# Altium PCB A6C.PcbDoc
Units mm, origin at the board's own origin, x right, y up, seen from the top; angles counter-clockwise.
Board outline 62.23 x 38.1 mm, 2 copper layers (Top Layer, Bottom Layer); 24 components, 181 nets, 114 pads, 0 vias.
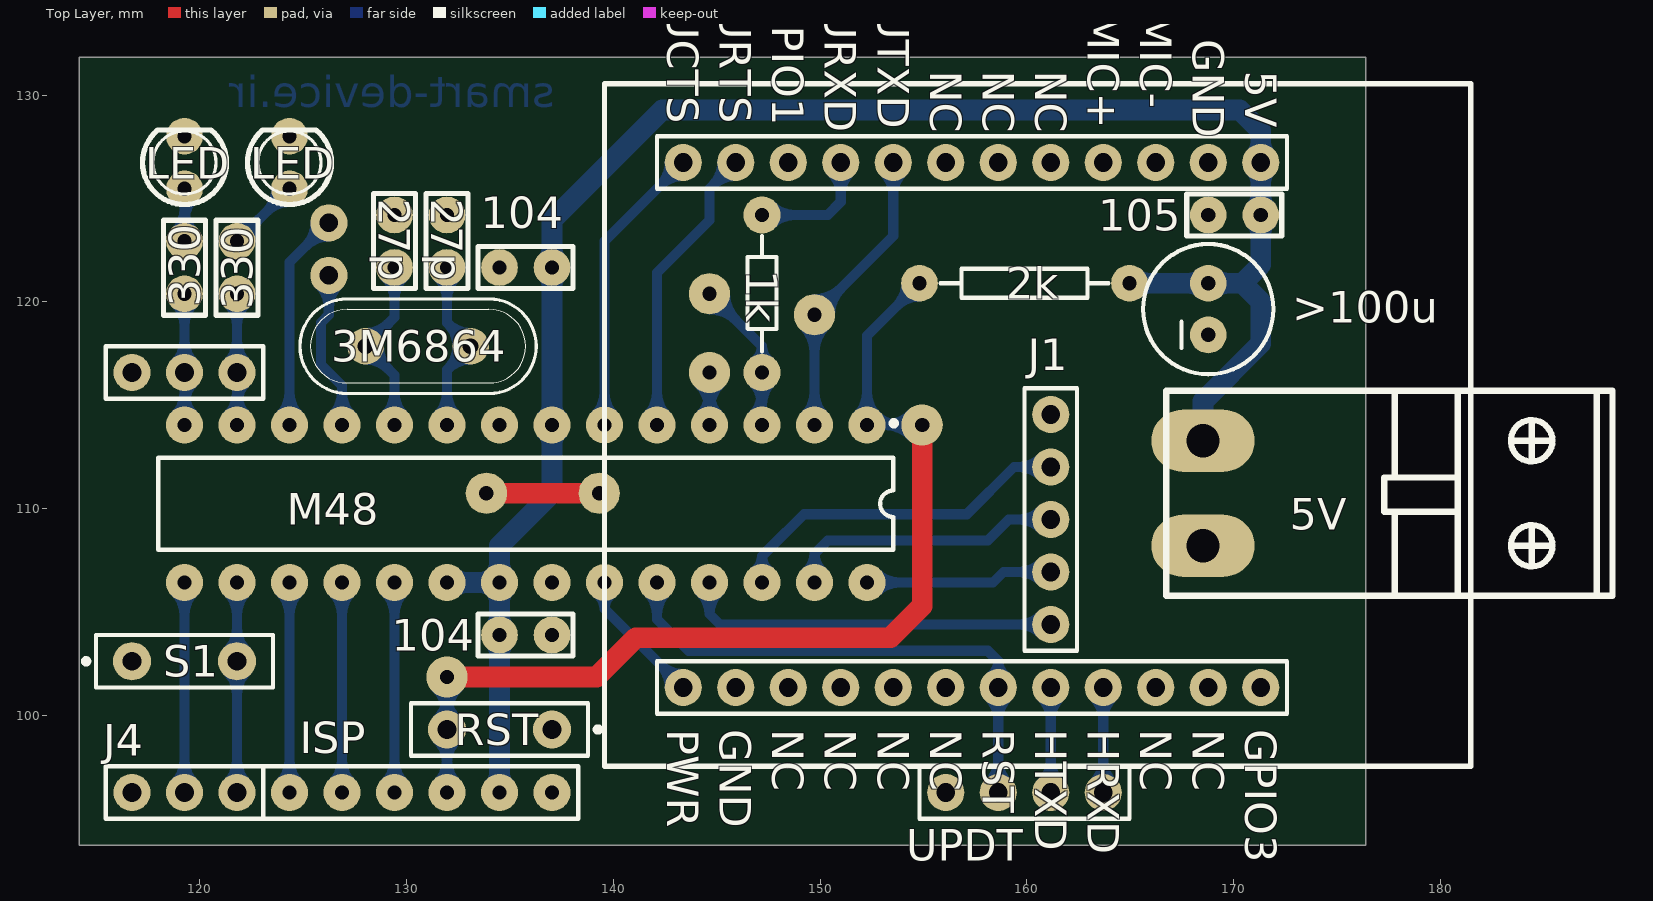
[diagram p0: Top Layer view]
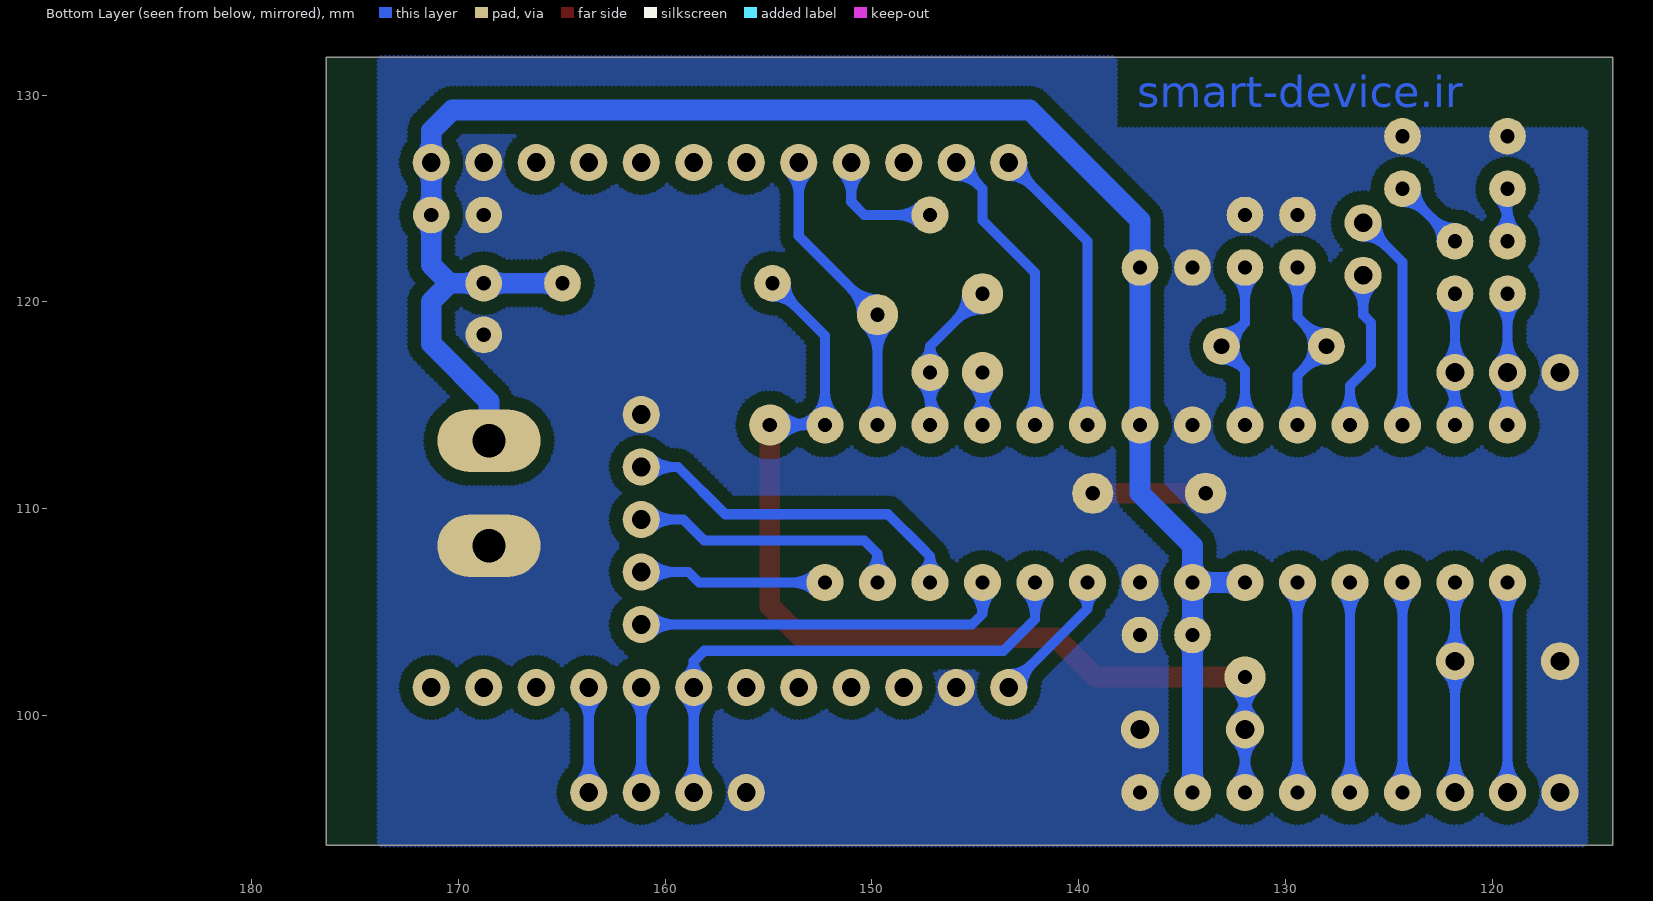
[diagram p1: Bottom Layer view, seen from below]

## Layer stack, top to bottom
Top Solder: solder mask 0.0102, Solder Resist, Dk 3.5
Top Layer: signal copper 0.0356
Dielectric 1: dielectric 0.32, FR-4, Dk 4.8
Bottom Layer: signal copper 0.0356
Bottom Solder: solder mask 0.0102, Solder Resist, Dk 3.5

## Board outline
114.173,93.726 114.173,131.826 176.403,131.826 176.403,93.726

## Design rules (kind name [scope] priority, off if disabled: settings)
Clearance [All] p1: gap=0.635 ignorepadtopadclearanceinfootprint=FALSE
PlaneClearance [All] p1: clearance=0.635
PlaneConnect [All] p1: planeconnectstyle=Direct reliefexpansion=0.508 reliefentries=4 reliefconductorwidth=0.254 reliefairgap=0.254
PolygonConnect [All] p1: connectstyle=Direct reliefconductorwidth=0.254 reliefentries=4 polygonreliefangle="90 Angle" airgapwidth=0.254
RoutingVias [All] p1: holewidth=0.711 width=1.27 viastyle="Through Hole" minholewidth=0.711 minwidth=1.27 maxholewidth=0.711 maxwidth=1.27
SolderMaskExpansion [All] p1: expansion=0.102
Width [All] p1: maxlimit=2.54 minlimit=0.229 preferedwidth=0.254
28 further rules are at their usual default settings.

## Components (designator, comment, footprint, x,y, rotation, side; value= is the part's Value field where it differs from the comment)
1k "" AXIAL-0.3nar 147.193,124.206 r270 top
2k "" axial-0.4nar 164.973,120.904 r180 top
3M6864 "" Crystal 130.683,117.856 r180 top
5V "" phoenix2 168.529,113.284 r270 top (schematic designator J12)
27p "" rad-0.1nar 131.953,121.666 r90 top
27p "" rad-0.1nar 129.413,121.666 r90 top
104 "" rad-0.1nar 137.033,121.666 r180 top
104 "" rad-0.1nar 137.033,103.886 r180 top
105 "" rad-0.1nar 171.323,124.206 r180 top
330 "" rad-0.1nar 119.253,122.936 r270 top
330 "" rad-0.1nar 121.793,122.936 r270 top
>100u "100uF/25V" "RADIAL CAPACITOR - 100uF" 168.783,119.654 r90 top (schematic designator C3)
ISP "" HDR1X6 137.033,96.266 r180 top
J1 "" HDR1X5 161.163,104.394 r90 top
J4 "" HDR1X3 121.793,96.266 r180 top
LED "" LED 119.253,125.476 r180 top
LED "" LED 124.333,125.476 r180 top
M48 "" My_28P3 135.763,110.236 r180 top
RST "" SPST-2 134.493,99.314 r180 top
S1 "" SPST-2 119.253,102.616 r0 top
UPDT "" HDR1X4 163.703,96.266 r180 top
? "" HDR1X12 143.383,101.346 r0 top
? "" HDR1X12 143.383,126.746 r0 top
? "" HDR1X3 121.793,116.586 r180 top

## Footprints (in the part's own frame and the unit in brackets; to place one, negate y for a bottom-side part, rotate by r counter-clockwise, add the part's x,y. Pads: shape width x height; smd on the part's side, far side on the other; paste and mask are expansions set on the pad)
AXIAL-0.3nar [mm] "AXIAL-0.3 Narrow Res"
  round 1.8 hole 0.7: 1(0,0) 2(7.62,0)
  silkscreen extent 1.02,-0.7 6.6,0.7
axial-0.4nar [mil] "AXIAL-0.4 Narrow Res"
  round 70 hole 27.56: 1(0,0) 2(400,0)
  silkscreen extent 40,-28 360,28
Crystal [mil] "Crystal"
  round 70 hole 30: 1(-95,0) 2(105,0)
  silkscreen extent -220,-90 230,90
HDR1X3 [mm] "Connector; Header; 3 Position"
  round 1.8 hole 0.9: 1(0,0) 2(2.54,0) 3(5.08,0)
  silkscreen extent -1.27,-1.27 6.35,1.27
HDR1X4 [mm] "Connector; Header; 4 Position"
  round 1.8 hole 0.9: 1(0,0) 2(2.54,0) 3(5.08,0) 4(7.62,0)
  silkscreen extent -1.27,-1.27 8.89,1.27
HDR1X5 [mm] "Connector; Header; 5 Position"
  round 1.8 hole 0.9: 1(0,0) 2(2.54,0) 3(5.08,0) 4(7.62,0) 5(10.16,0)
  silkscreen extent -1.27,-1.27 11.43,1.27
HDR1X6 [mm] "Connector; Header; 6 Position"
  round 1.8 hole 0.7: 1(0,0) 2(2.54,0) 3(5.08,0) 4(7.62,0) 5(10.16,0) 6(12.7,0)
  silkscreen extent -1.27,-1.27 13.97,1.27
HDR1X12 [mm] "Connector; Header; 12 Position"
  round 1.8 hole 0.9: 1(0,0) 2(2.54,0) 3(5.08,0) 4(7.62,0) 5(10.16,0) 6(12.7,0) 7(15.24,0) 8(17.78,0) 9(20.32,0) 10(22.86,0) 11(25.4,0) 12(27.94,0)
  silkscreen extent -1.27,-1.27 29.21,1.27
LED [mil] "3mm LED"
  round 70 hole 27.56: 1(0,0) 2(0,-100)
  silkscreen extent -80,-112 80,30
My_28P3 [mm]
  round 1.8 hole 0.7: 1(-16.51,-3.81) 2(-13.97,-3.81) 3(-11.43,-3.81) 4(-8.89,-3.81) 5(-6.35,-3.81) 6(-3.81,-3.81) 7(-1.27,-3.81) 8(1.27,-3.81) 9(3.81,-3.81) 10(6.35,-3.81) 11(8.89,-3.81) 12(11.43,-3.81) 13(13.97,-3.81) 14(16.51,-3.81) 15(16.51,3.81) 16(13.97,3.81) 17(11.43,3.81) 18(8.89,3.81) 19(6.35,3.81) 20(3.81,3.81) 21(1.27,3.81) 22(-1.27,3.81) 23(-3.81,3.81) 24(-6.35,3.81) 25(-8.89,3.81) 26(-11.43,3.81) 27(-13.97,3.81) 28(-16.51,3.81)
  silkscreen extent -17.93,-4.02 17.78,2.23
phoenix2 [mm] "Phoenix 2"
  oval 3x5 hole 1.6: 1(5.08,0) 2(0,0)
  silkscreen extent -2.41,-1.78 7.49,19.81
rad-0.1nar [mil] "RAD-0.1 Narrow"
  round 70 hole 27.56: 1(0,0) 2(100,0)
  silkscreen extent -40,-40 141,40
"RADIAL CAPACITOR - 100uF" [mm] "RADIAL CAPACITOR - 100uF"
  round 1.778 hole 0.7: 1(1.25,0)
  round 1.778 hole 0.7 paste+0: 2(-1.25,0)
  silkscreen extent -3.15,-3.15 3.15,3.15
SPST-2 [mm] "Switch; 2 Leads"
  round 1.85 hole 0.9: 1(-2.54,0) 2(2.54,0)
  silkscreen extent -4.89,-1.27 4.28,1.27

## Part data
5V: library part "Header 2", "Header, 2-Pin", LatestRevisionDate=17-Jul-2002, LatestRevisionNote="Re-released for DXP Platform.", Publisher="Altium Limited"
>100u: library part "Cap Pol1", "Polarized Capacitor (Radial)", LatestRevisionDate=17-Jul-2002, LatestRevisionNote="Re-released for DXP Platform.", PackageDescription="Polarized Capacitor (Radial); 2 Leads", PackageReference=RB7.6-15, Published=8-Jun-2000, Publisher="Altium Limited"
? ?: library part "Header 12"

## Free pads (board coordinates)
  round 2 hole 0.7: 2(131.953,101.854) 3(154.94,114.046) 94(133.858,110.744) 95(139.319,110.744) 96(144.653,116.586) 97(144.653,120.396) 98(149.733,119.38)
  round 1.8 hole 0.9: 4(126.238,123.825) 5(126.238,121.285)

## Nets (pads, with @x,y where several pads share a name; then routed paths per layer and width w, separated by ;. In a path a pad name is that pad's centre, name@x,y a point inside that pad or via, vN(x,y) a via of type N, cw(c..) or ccw(c..) an arc to the next point about the centre after c; other vN are vias at no path point)
3V3: 
+5: 5V.2
+12V: 
+24V: 
A: 
Aref: 
AVcc: 
B: 
Ch1: 
Ch2: 
Ch3: 
Ch4: 
Ch5: 
Ch6: 
Ch7: 
Ch8: 
EARTH: 
GND: 5V.1 27p.2 104.1@137.033,103.886 104.2@134.493,121.666 105.2 >100u.2 ?.2@145.923,101.346 ?.3@116.713,116.586 ?.11@168.783,126.746 ISP.1 J1.5 J4.3 LED.2 M48.8 M48.22 pad.94 pad.95 RST.1 S1.1 UPDT.4 | length 5.5
  Top Layer w1: pad.94 pad.95
NetC21_1: 
NetC21_2: 
NetC24_2: 
NetC32_1: 
NetC32_2: 
NetC35_1: 
NetC35_2: 
NetC36_1: 
NetC36_2: 
NetD2_2: 
NetD3_1: 
NetD3_2: 
NetD4_1: 
NetD4_2: 
NetD5_1: 
NetD5_2: 
NetD6_1: 
NetD6_2: 
NetD7_1: 
NetD7_2: 
NetD8_1: 
NetD8_2: 
NetD9_1: 
NetD9_2: 
NetD10_1: 
NetD10_2: 
NetD11_2: 
NetD12_2: 
NetJ5_2: 
NetJ6_2: 
NetJ7_2: 
NetJ8_2: 
NetJ9_2: 
NetJ10_2: 
NetJ11_2: 
NetJ12_2: 
NetJ13_1: 
NetJ13_2: 
NetJ14_3: 
NetJr_2: 
NetJr_3: 
NetJr_4: 
NetJr_5: 
NetJr_6: 
NetJr_7: 
NetJr_8: 
NetJr_9: 
NetQ1_1: 
NetQ1_2: 
NetR1_2: 
NetR2_2: 
NetR3_2: 
NetR4_2: 
NetR5_2: 
NetR6_2: 
NetR7_2: 
NetR8_2: 
NetR9_1: 
NetR10_1: 
NetR11_1: 
NetR12_1: 
NetR13_1: 
NetR14_1: 
NetR15_1: 
NetR16_1: 
NetR18_2: 
NetR19_1: 
NetR20_1: 
NetR21_1: 
NetR22_1: 
NetR23_1: 
NetR24_1: 
NetR25_1: 
NetR28_1: 
NetR29_1: 
NetR30_1: 
NetR31_1: 
NetR33_2: 
NetR34_1: 
NetR36_2: 
NetR37_2: 
NetR39_2: 
NetR40_1: 
NetR42_2: 
NetR43_2: 
NetR46_2: 
NetR47_2: 
NetR48_1: 
NetR49_1: 
NetR51_2: 
NetR52_2: 
NetR54_2: 
NetR55_2: 
NetR56_1: 
NetR57_1: 
NetR58_1: 
NetR59_1: 
NetRa3_2: 
NetRa3_3: 
NetRa3_4: 
NetRa3_5: 
NetRa3_6: 
NetRa3_7: 
NetRa3_8: 
NetRa3_9: 
OC0: 
OC1A: 
OC1B: 
OC3A: 
OC3B: 
OC3C: 
PA0: 
PA1: 
PA2: 
PA3: 
PA4: 
PA5: 
PA6: 
PA7: 
PB0: 
PB1: 
PB2: 
PB3: 
PB7: 
PC0: 
PC1: 
PC2: 
PC3: 
PC4: 
PC5: 
PC6: 
PC7: 
PD0: 
PD1: 
PD4: 
PD5: 
PD6: 
PD7: 
PE2: 
PE6: 
PE7: 
PF0: 
PF1: 
PF2: 
PF3: 
PF4: 
PF5: 
PF6: 
PF7: 
PG0: 
PG1: 
PG2: 
PG3: 
PG4: 
PWM1: 
PWM2: 
PWM3: 
PWM4: 
RX0: 
RX1: 
TX0: 
TX1: 
VCC: 
pads on no net: 1k.1 1k.2 2k.1 2k.2 3M6864.1 3M6864.2 27p.1 104.1@137.033,121.666 104.2@134.493,103.886 105.1 330.1 330.2 >100u.1 ?.1 ?.2@119.253,116.586 ?.2@145.923,126.746 ?.3@148.463,101.346 ?.3@148.463,126.746 ?.4 ?.5 ?.6 ?.7 ?.8 ?.9 ?.10 ?.11@168.783,101.346 ?.12 ISP.2 ISP.3 ISP.4 ISP.5 ISP.6 J1.1 J1.2 J1.3 J1.4 J4.1 J4.2 LED.1 M48.1 M48.2 M48.3 M48.4 M48.5 M48.6 M48.7 M48.9 M48.10 M48.11 M48.12 M48.13 M48.14 M48.15 M48.16 M48.17 M48.18 M48.19 M48.20 M48.21 M48.23 M48.24 M48.25 M48.26 M48.27 M48.28 RST.2 S1.2 UPDT.1 UPDT.2 UPDT.3
copper on no net: | length 621.8
  Top Layer w1: 131.953,101.854 139.192,101.854 141.097,103.759 153.416,103.759 154.94,105.283 154.94,114.046
  Bottom Layer w0.5: 118.793,96.726 ccw(c117.684,97.835) 119.253,97.835 ccw(c120.822,97.835) 119.713,96.726 ; 118.793,105.966 cw(c117.684,104.857) 119.253,104.857 cw(c120.822,104.857) 119.713,105.966 ; 118.793,114.506 ccw(c117.684,115.615) 119.253,115.615 ccw(c120.822,115.615) 119.713,114.506 ; 118.793,117.046 ccw(c117.684,118.155) 119.253,118.155 ccw(c120.822,118.155) 119.713,117.046 ; 118.801,119.944 cw(c117.71,118.853) 119.253,118.853 cw(c120.796,118.853) 119.705,119.944 ; 118.801,123.388 ccw(c117.71,124.479) 119.253,124.479 ccw(c120.796,124.479) 119.705,123.388 ; 119.253,96.266 119.253,106.426 ; 119.253,114.046 119.253,120.396 ; 119.253,115.017 cw(c120.822,115.017) 119.713,116.126 ; 119.253,122.936 119.253,125.476 ; 119.253,123.933 cw(c120.796,123.933) 119.705,125.024 ; 121.316,102.139 cw(c120.163,100.986) 121.793,100.986 cw(c123.423,100.986) 122.27,102.139 ; 121.316,103.093 ccw(c120.163,104.246) 121.793,104.246 ccw(c123.423,104.246) 122.27,103.093 ; 121.333,96.726 ccw(c120.224,97.835) 121.793,97.835 ccw(c123.362,97.835) 122.253,96.726 ; 121.333,105.966 cw(c120.224,104.857) 121.793,104.857 cw(c123.362,104.857) 122.253,105.966 ; 121.333,114.506 ccw(c120.224,115.615) 121.793,115.615 ccw(c123.362,115.615) 122.253,114.506 ; 121.333,117.046 ccw(c120.224,118.155) 121.793,118.155 ccw(c123.362,118.155) 122.253,117.046 ; 121.341,119.944 cw(c120.25,118.853) 121.793,118.853 cw(c123.336,118.853) 122.245,119.944 ; 121.793,96.266 121.793,106.426 ; 121.793,114.046 121.793,120.396 ; 121.793,115.017 cw(c123.362,115.017) 122.253,116.126 ; 121.793,122.936 124.333,125.476 ; 121.793,123.575 ccw(c121.793,125.118) 122.884,124.027 ccw(c123.975,122.936) 122.432,122.936 ; 123.694,125.476 cw(c122.151,125.476) 123.242,124.385 cw(c124.333,123.294) 124.333,124.837 ; 123.873,96.726 ccw(c122.764,97.835) 124.333,97.835 ccw(c125.902,97.835) 124.793,96.726 ; 123.873,105.966 cw(c122.764,104.857) 124.333,104.857 cw(c125.902,104.857) 124.793,105.966 ; 123.873,114.506 ccw(c122.764,115.615) 124.333,115.615 ccw(c125.902,115.615) 124.793,114.506 ; 124.333,96.266 124.333,106.426 ; 124.333,114.046 124.333,121.92 126.238,123.825 ; 125.588,123.825 cw(c124.019,123.825) 125.128,122.715 cw(c126.238,121.606) 126.238,123.175 ; 125.778,120.825 cw(c124.669,119.716) 126.238,119.716 cw(c127.807,119.716) 126.698,120.825 ; 126.238,121.285 126.238,119.38 125.857,118.999 125.857,116.967 126.873,115.951 126.873,114.046 ; 126.413,96.726 ccw(c125.304,97.835) 126.873,97.835 ccw(c128.442,97.835) 127.333,96.726 ; 126.413,105.966 cw(c125.304,104.857) 126.873,104.857 cw(c128.442,104.857) 127.333,105.966 ; 126.413,114.506 ccw(c125.304,115.615) 126.873,115.615 ccw(c128.442,115.615) 127.333,114.506 ; 126.873,96.266 126.873,106.426 ; 128.016,117.217 cw(c128.016,115.674) 129.107,116.765 cw(c130.198,117.856) 128.655,117.856 cw(c130.198,117.856) 129.107,118.947 cw(c128.016,120.038) 128.016,118.495 ; 128.953,96.726 ccw(c127.844,97.835) 129.413,97.835 ccw(c130.982,97.835) 129.873,96.726 ; 128.953,105.966 cw(c127.844,104.857) 129.413,104.857 cw(c130.982,104.857) 129.873,105.966 ; 128.953,114.506 ccw(c127.844,115.615) 129.413,115.615 ccw(c130.982,115.615) 129.873,114.506 ; 128.961,121.214 cw(c127.87,120.123) 129.413,120.123 cw(c130.956,120.123) 129.865,121.214 ; 129.413,96.266 129.413,106.426 ; 129.413,114.046 129.413,116.459 128.016,117.856 129.413,119.253 129.413,121.666 ; 131.423,101.324 cw(c130.142,100.043) 131.953,100.043 cw(c133.764,100.043) 132.483,101.324 ; 131.476,98.837 cw(c130.323,97.684) 131.953,97.684 cw(c133.583,97.684) 132.43,98.837 ; 131.476,99.791 ccw(c130.323,100.944) 131.953,100.944 ccw(c133.583,100.944) 132.43,99.791 ; 131.493,96.726 ccw(c130.384,97.835) 131.953,97.835 ccw(c133.522,97.835) 132.413,96.726 ; 131.493,114.506 ccw(c130.384,115.615) 131.953,115.615 ccw(c133.522,115.615) 132.413,114.506 ; 131.501,121.214 cw(c130.41,120.123) 131.953,120.123 cw(c133.496,120.123) 132.405,121.214 ; 131.953,96.266 131.953,101.854 ; 131.953,114.046 131.953,116.713 133.096,117.856 131.953,118.999 131.953,121.666 ; 133.096,117.217 ccw(c133.096,115.674) 132.005,116.765 ccw(c130.914,117.856) 132.457,117.856 ccw(c130.914,117.856) 132.005,118.947 ccw(c133.096,120.038) 133.096,118.495 ; 139.113,114.506 ccw(c138.004,115.615) 139.573,115.615 ccw(c141.142,115.615) 140.033,114.506 ; 139.193,105.899 cw(c138.657,105.156) 139.573,105.156 ; 139.573,106.426 139.573,105.156 ; 139.573,114.046 139.573,122.936 143.383,126.746 ; 139.953,105.899 ccw(c140.489,105.156) 139.573,105.156 ; 141.653,105.966 cw(c140.544,104.857) 142.113,104.857 cw(c143.682,104.857) 142.573,105.966 ; 141.653,114.506 ccw(c140.544,115.615) 142.113,115.615 ccw(c143.682,115.615) 142.573,114.506 ; 142.113,106.426 142.113,104.648 143.637,103.124 158.115,103.124 158.623,102.616 ; 142.113,114.046 142.113,121.412 144.653,123.952 144.653,125.476 145.923,126.746 ; 142.733,101.346 ccw(c141.164,101.346) 142.273,102.456 ccw(c143.383,103.565) 143.383,101.996 ; 142.733,126.746 cw(c141.164,126.746) 142.273,125.636 cw(c143.383,124.527) 143.383,126.096 ; 143.383,101.346 139.573,105.156 ; 144.123,116.056 cw(c142.842,114.775) 144.653,114.775 cw(c146.464,114.775) 145.183,116.056 ; 144.193,114.506 ccw(c143.084,115.615) 144.653,115.615 ccw(c146.222,115.615) 145.113,114.506 ; 144.203,105.957 cw(c143.192,104.902) 144.653,104.902 ; 144.653,106.426 144.653,104.902 ; 144.653,114.046 144.653,116.586 ; 144.653,119.646 cw(c144.653,117.835) 145.933,119.116 cw(c147.214,120.396) 145.403,120.396 ; 144.653,120.396 147.193,117.856 ; 145.103,105.957 ccw(c146.114,104.902) 144.653,104.902 ; 145.273,126.746 cw(c143.704,126.746) 144.813,125.636 cw(c145.923,124.527) 145.923,126.096 ; 146.733,114.506 ccw(c145.624,115.615) 147.193,115.615 ; 146.813,106.953 ccw(c146.277,107.696) 147.193,107.696 ; 147.193,106.426 147.193,107.696 ; 147.193,114.046 147.193,116.586 147.193,117.856 ; 147.193,124.206 150.368,124.206 151.003,124.841 151.003,126.746 ; 147.573,106.953 cw(c148.109,107.696) 147.193,107.696 ; 149.203,118.85 cw(c147.922,117.569) 149.733,117.569 cw(c151.544,117.569) 150.263,118.85 ; 149.273,114.506 ccw(c148.164,115.615) 149.733,115.615 ccw(c151.302,115.615) 150.193,114.506 ; 149.314,106.923 ccw(c148.557,107.823) 149.733,107.823 ; 149.733,106.426 149.733,107.823 ; 149.733,114.046 149.733,119.38 153.543,123.19 153.543,126.746 ; 149.733,120.13 ccw(c149.733,121.941) 151.013,120.66 ccw(c152.294,119.38) 150.483,119.38 ; 150.152,106.923 cw(c150.909,107.823) 149.733,107.823 ; 150.543,126.286 cw(c149.434,125.177) 151.003,125.177 cw(c152.572,125.177) 151.463,126.286 ; 151.813,114.506 ccw(c150.704,115.615) 152.273,115.615 ccw(c153.842,115.615) 152.733,114.506 ccw(c153.842,115.615) 153.842,114.046 ; 152.273,106.426 158.369,106.426 158.877,106.934 161.163,106.934 ; 152.733,105.966 cw(c153.842,104.857) 153.842,106.426 cw(c153.842,107.995) 152.733,106.886 ; 153.083,126.286 cw(c151.974,125.177) 153.543,125.177 cw(c155.112,125.177) 154.003,126.286 ; 154.174,120.904 cw(c152.631,120.904) 153.722,119.813 cw(c154.813,118.722) 154.813,120.265 ; 154.41,113.516 ccw(c153.129,112.235) 153.129,114.046 ccw(c153.129,115.857) 154.41,114.576 ; 154.813,120.904 152.273,118.364 152.273,114.046 154.94,114.046 ; 158.163,96.726 ccw(c157.054,97.835) 158.623,97.835 ccw(c160.192,97.835) 159.083,96.726 ; 158.163,100.886 cw(c157.054,99.777) 158.623,99.777 cw(c160.192,99.777) 159.083,100.886 ; 158.243,101.873 ccw(c157.707,102.616) 158.623,102.616 ; 158.623,96.266 158.623,101.346 158.623,102.616 ; 159.003,101.873 cw(c159.539,102.616) 158.623,102.616 ; 160.401,104.394 157.226,104.394 145.161,104.394 144.653,104.902 ; 160.703,96.726 ccw(c159.594,97.835) 161.163,97.835 ccw(c162.732,97.835) 161.623,96.726 ; 160.703,100.886 cw(c159.594,99.777) 161.163,99.777 cw(c162.732,99.777) 161.623,100.886 ; 160.703,103.934 ccw(c159.594,102.825) 159.594,104.394 ccw(c159.594,105.963) 160.703,104.854 ; 160.703,106.474 ccw(c159.594,105.365) 159.594,106.934 ccw(c159.594,108.503) 160.703,107.394 ; 160.703,109.014 ccw(c159.594,107.905) 159.594,109.474 ccw(c159.594,111.043) 160.703,109.934 ; 160.703,111.554 ccw(c159.594,110.445) 159.594,112.014 ccw(c159.594,113.583) 160.703,112.474 ; 161.163,96.266 161.163,101.346 ; 161.163,109.474 159.131,109.474 158.115,108.458 150.368,108.458 149.733,107.823 ; 161.163,112.014 159.385,112.014 157.099,109.728 151.003,109.728 149.225,109.728 147.574,108.077 147.193,107.696 ; 163.243,96.726 ccw(c162.134,97.835) 163.703,97.835 ccw(c165.272,97.835) 164.163,96.726 ; 163.243,100.886 cw(c162.134,99.777) 163.703,99.777 cw(c165.272,99.777) 164.163,100.886 ; 163.703,96.266 163.703,101.346 ; 147.193,115.017 ccw(c145.624,115.017) 146.733,116.126 cw(c145.624,115.017) 147.193,115.017 ; 147.193,115.017 cw(c148.762,115.017) 147.653,116.126 ccw(c148.762,115.017) 147.193,115.017 ; 147.193,117.856 ccw(c148.109,117.856) 147.573,117.113 cw(c148.109,117.856) 147.193,117.856 ; 147.193,117.856 cw(c146.277,117.856) 146.813,117.113 ccw(c146.277,117.856) 147.193,117.856 ; 148.762,124.206 ccw(c148.762,122.637) 147.653,123.746 cw(c148.762,122.637) 148.762,124.206 ; 148.762,124.206 cw(c148.762,125.775) 147.653,124.666 ccw(c148.762,125.775) 148.762,124.206
  Bottom Layer w1: 131.953,106.426 134.493,106.426 ; 132.236,106.143 cw(c132.919,105.46) 132.919,106.426 cw(c132.919,107.392) 132.236,106.709 ; 134.21,96.549 ccw(c133.527,97.232) 134.493,97.232 ccw(c135.459,97.232) 134.776,96.549 ; 134.218,103.611 cw(c133.554,102.947) 134.493,102.947 cw(c135.432,102.947) 134.768,103.611 ; 134.218,104.161 ccw(c133.554,104.825) 134.493,104.825 ccw(c135.432,104.825) 134.768,104.161 ; 134.493,96.266 134.493,103.886 134.493,106.426 ; 134.776,106.143 ccw(c135.459,105.46) 134.493,105.46 ccw(c133.527,105.46) 134.21,106.143 ccw(c133.527,105.46) 133.527,106.426 ccw(c133.527,107.392) 134.21,106.709 ccw(c133.527,107.392) 134.493,107.392 ccw(c135.459,107.392) 134.776,106.709 ; 136.75,113.763 cw(c136.067,113.08) 137.033,113.08 cw(c137.999,113.08) 137.316,113.763 ; 136.75,114.329 ccw(c136.067,115.012) 137.033,115.012 ccw(c137.999,115.012) 137.316,114.329 ; 136.758,121.391 cw(c136.094,120.727) 137.033,120.727 cw(c137.972,120.727) 137.308,121.391 ; 136.758,121.941 ccw(c136.094,122.605) 137.033,122.605 ccw(c137.972,122.605) 137.308,121.941 ; 164.973,120.904 168.783,120.904 170.434,120.904 ; 165.248,120.629 cw(c165.912,119.965) 165.912,120.904 cw(c165.912,121.843) 165.248,121.179 ; 168.508,120.629 ccw(c167.844,119.965) 167.844,120.904 ccw(c167.844,121.843) 168.508,121.179 ; 168.529,113.284 168.529,115.189 171.323,117.983 171.323,120.015 170.434,120.904 ; 169.058,120.629 cw(c169.722,119.965) 169.722,120.904 cw(c169.722,121.843) 169.058,121.179 ; 171.04,126.463 cw(c170.357,125.78) 171.323,125.78 cw(c172.289,125.78) 171.606,126.463 ; 171.04,127.029 ccw(c170.357,127.712) 171.323,127.712 ccw(c172.289,127.712) 171.606,127.029 ; 171.048,123.931 cw(c170.384,123.267) 171.323,123.267 cw(c172.262,123.267) 171.598,123.931 ; 171.048,124.481 ccw(c170.384,125.145) 171.323,125.145 ccw(c172.262,125.145) 171.598,124.481 ; 134.493,106.426 134.493,108.204 137.033,110.744 137.033,114.046 137.033,123.952 142.367,129.286 170.307,129.286 171.323,128.27 171.323,126.746 171.323,121.793 170.434,120.904

## Polygon pours and split planes (outlines as drawn)
GND on Bottom Layer "GND" (hatched 90Degree grid 0.203 track 0.229, remove dead copper, pour order 0): 115.443,131.826 173.863,131.826 173.863,93.726 115.443,93.726

## Other copper
Bottom Layer:
  text "smart-device.ir" at 137.16,129.413 h1.52

## Silkscreen, mask and mechanical layers (free items; w line width, h text height)
Top Overlay:
  lines w0.254: 139.573,97.536 139.573,130.556 181.483,130.556 181.483,97.536 139.573,97.536
  text "GPIO1" at 147.701,135.001 h1.52 r270
  text "UCTS" at 142.621,134.239 h1.52 r270
  text "URTS" at 145.161,134.239 h1.52 r270
  text "URXD" at 150.241,134.239 h1.52 r270
  text "UTXD" at 152.781,134.239 h1.52 r270
  text "MIC+" at 162.941,133.985 h1.52 r270
  text "MIC-" at 165.481,133.985 h1.52 r270
  text "GND" at 168.021,132.716 h1.52 r270
  text "NC" at 155.321,131.192 h1.52 r270
  text "NC" at 157.861,131.192 h1.52 r270
  text "NC" at 160.401,131.192 h1.52 r270
  text "5V" at 170.561,131.192 h1.52 r270
  text "PWR" at 142.621,99.314 h1.52 r270
  text "GND" at 145.161,99.314 h1.52 r270
  text "NC" at 147.701,99.314 h1.52 r270
  text "NC" at 150.241,99.314 h1.52 r270
  text "NC" at 152.781,99.314 h1.52 r270
  text "NC" at 155.321,99.314 h1.52 r270
  text "RST" at 157.861,99.314 h1.52 r270
  text "HTXD" at 160.401,99.314 h1.52 r270
  text "HRXD" at 162.941,99.314 h1.52 r270
  text "NC" at 165.481,99.314 h1.52 r270
  text "NC" at 168.021,99.314 h1.52 r270
  text "GPIO3" at 170.561,99.314 h1.52 r270